# Altium PCB V2.1.2.PcbDoc
Units mm, origin at the board's own origin, x right, y up, seen from the top; angles counter-clockwise.
Board outline 50 x 50 mm, 2 copper layers (Top Layer, Bottom Layer), stack 1.57 mm thick; 57 components, 44 nets, 215 pads, 71 vias.
Unrouted connection lines stored in the file: 2.
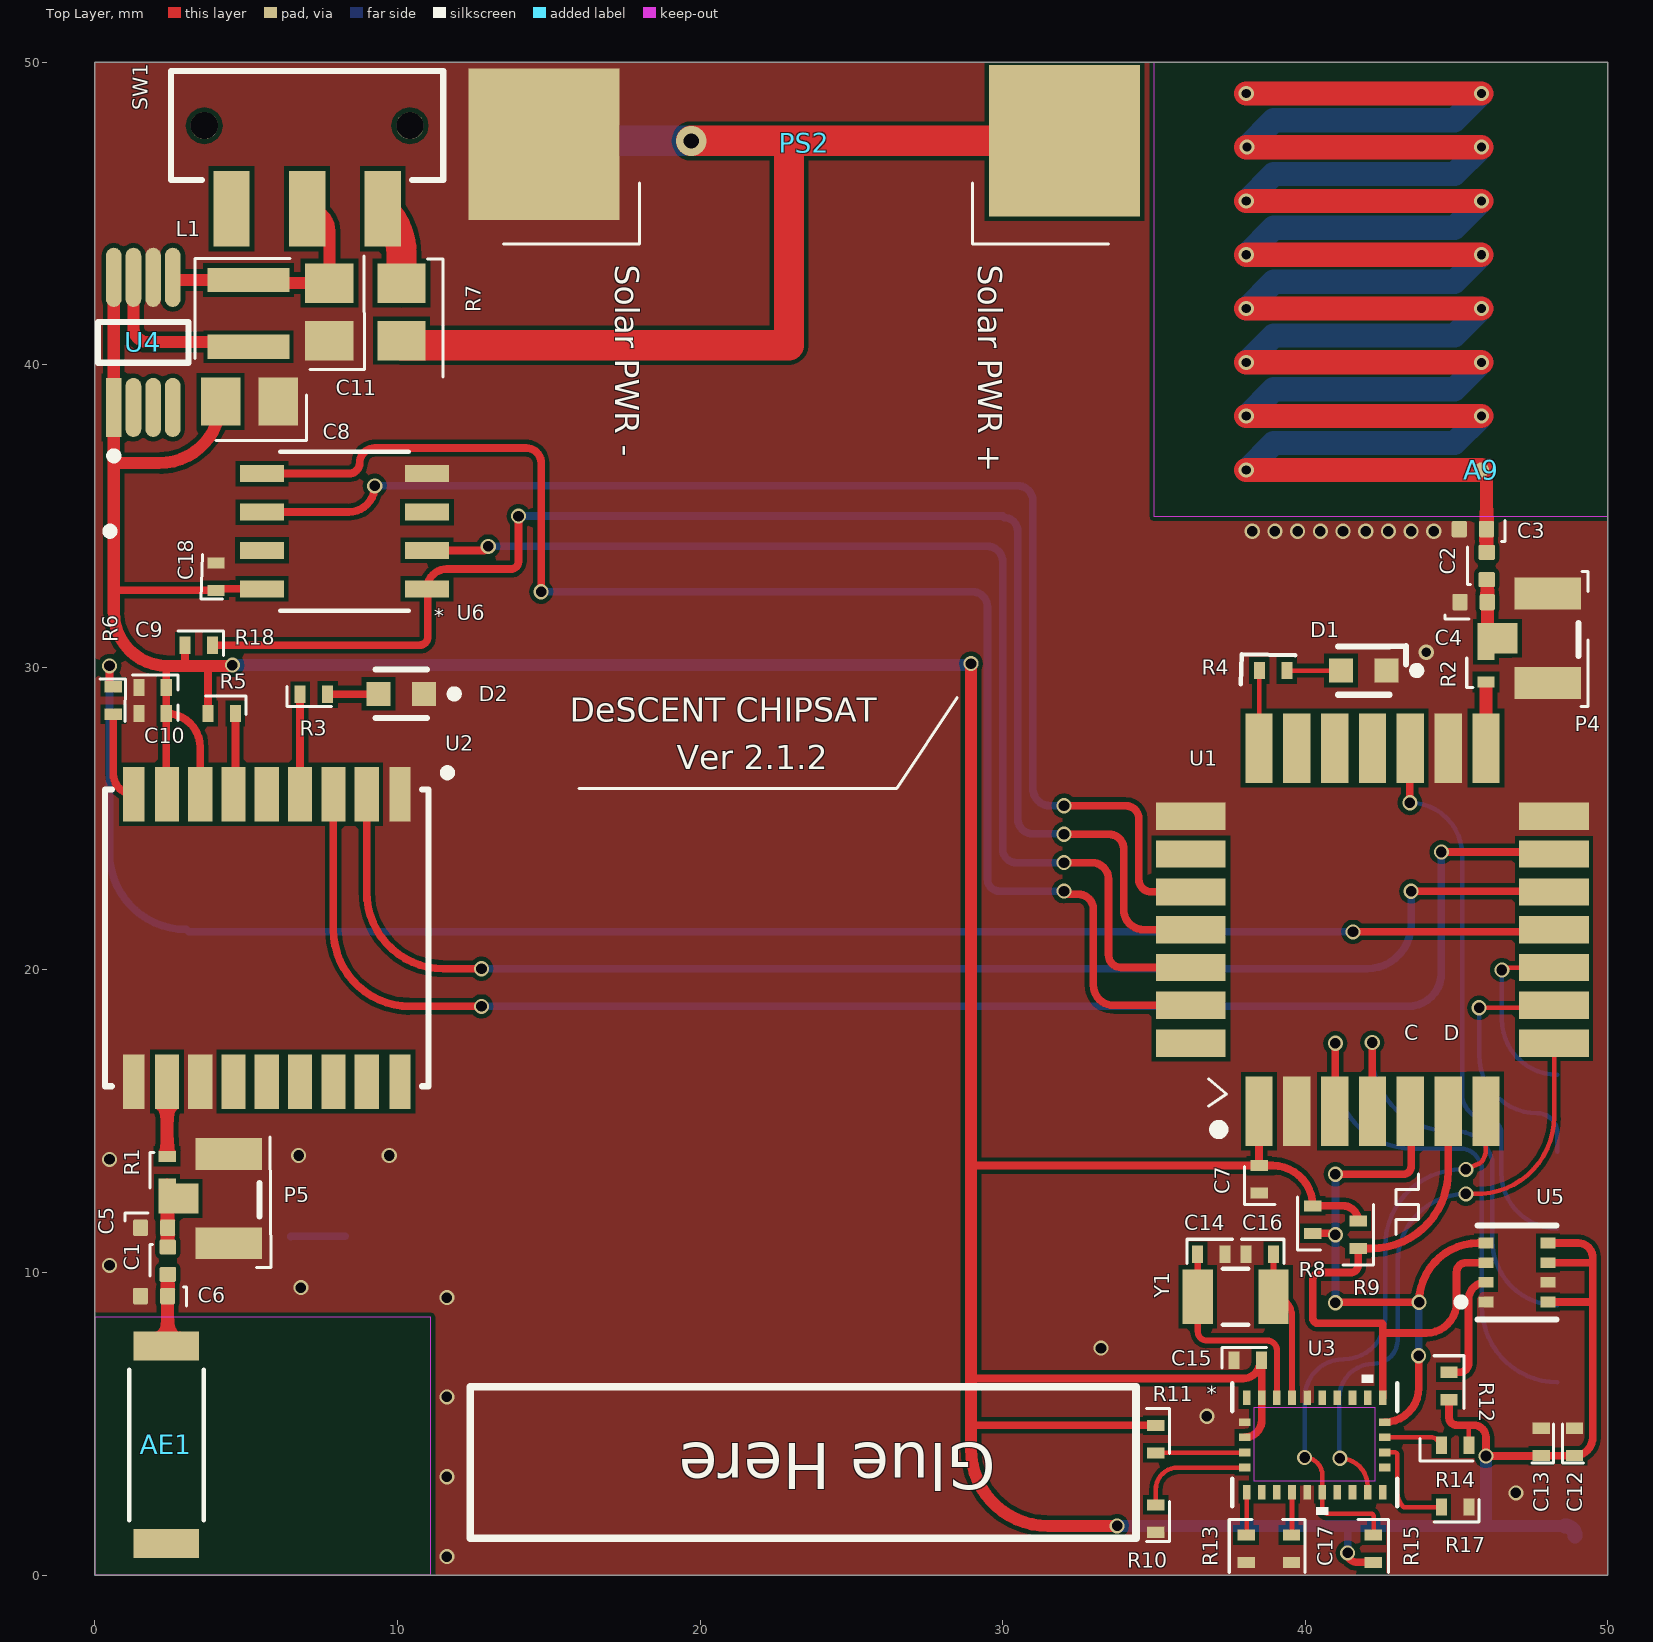
[diagram p0: Top Layer view]
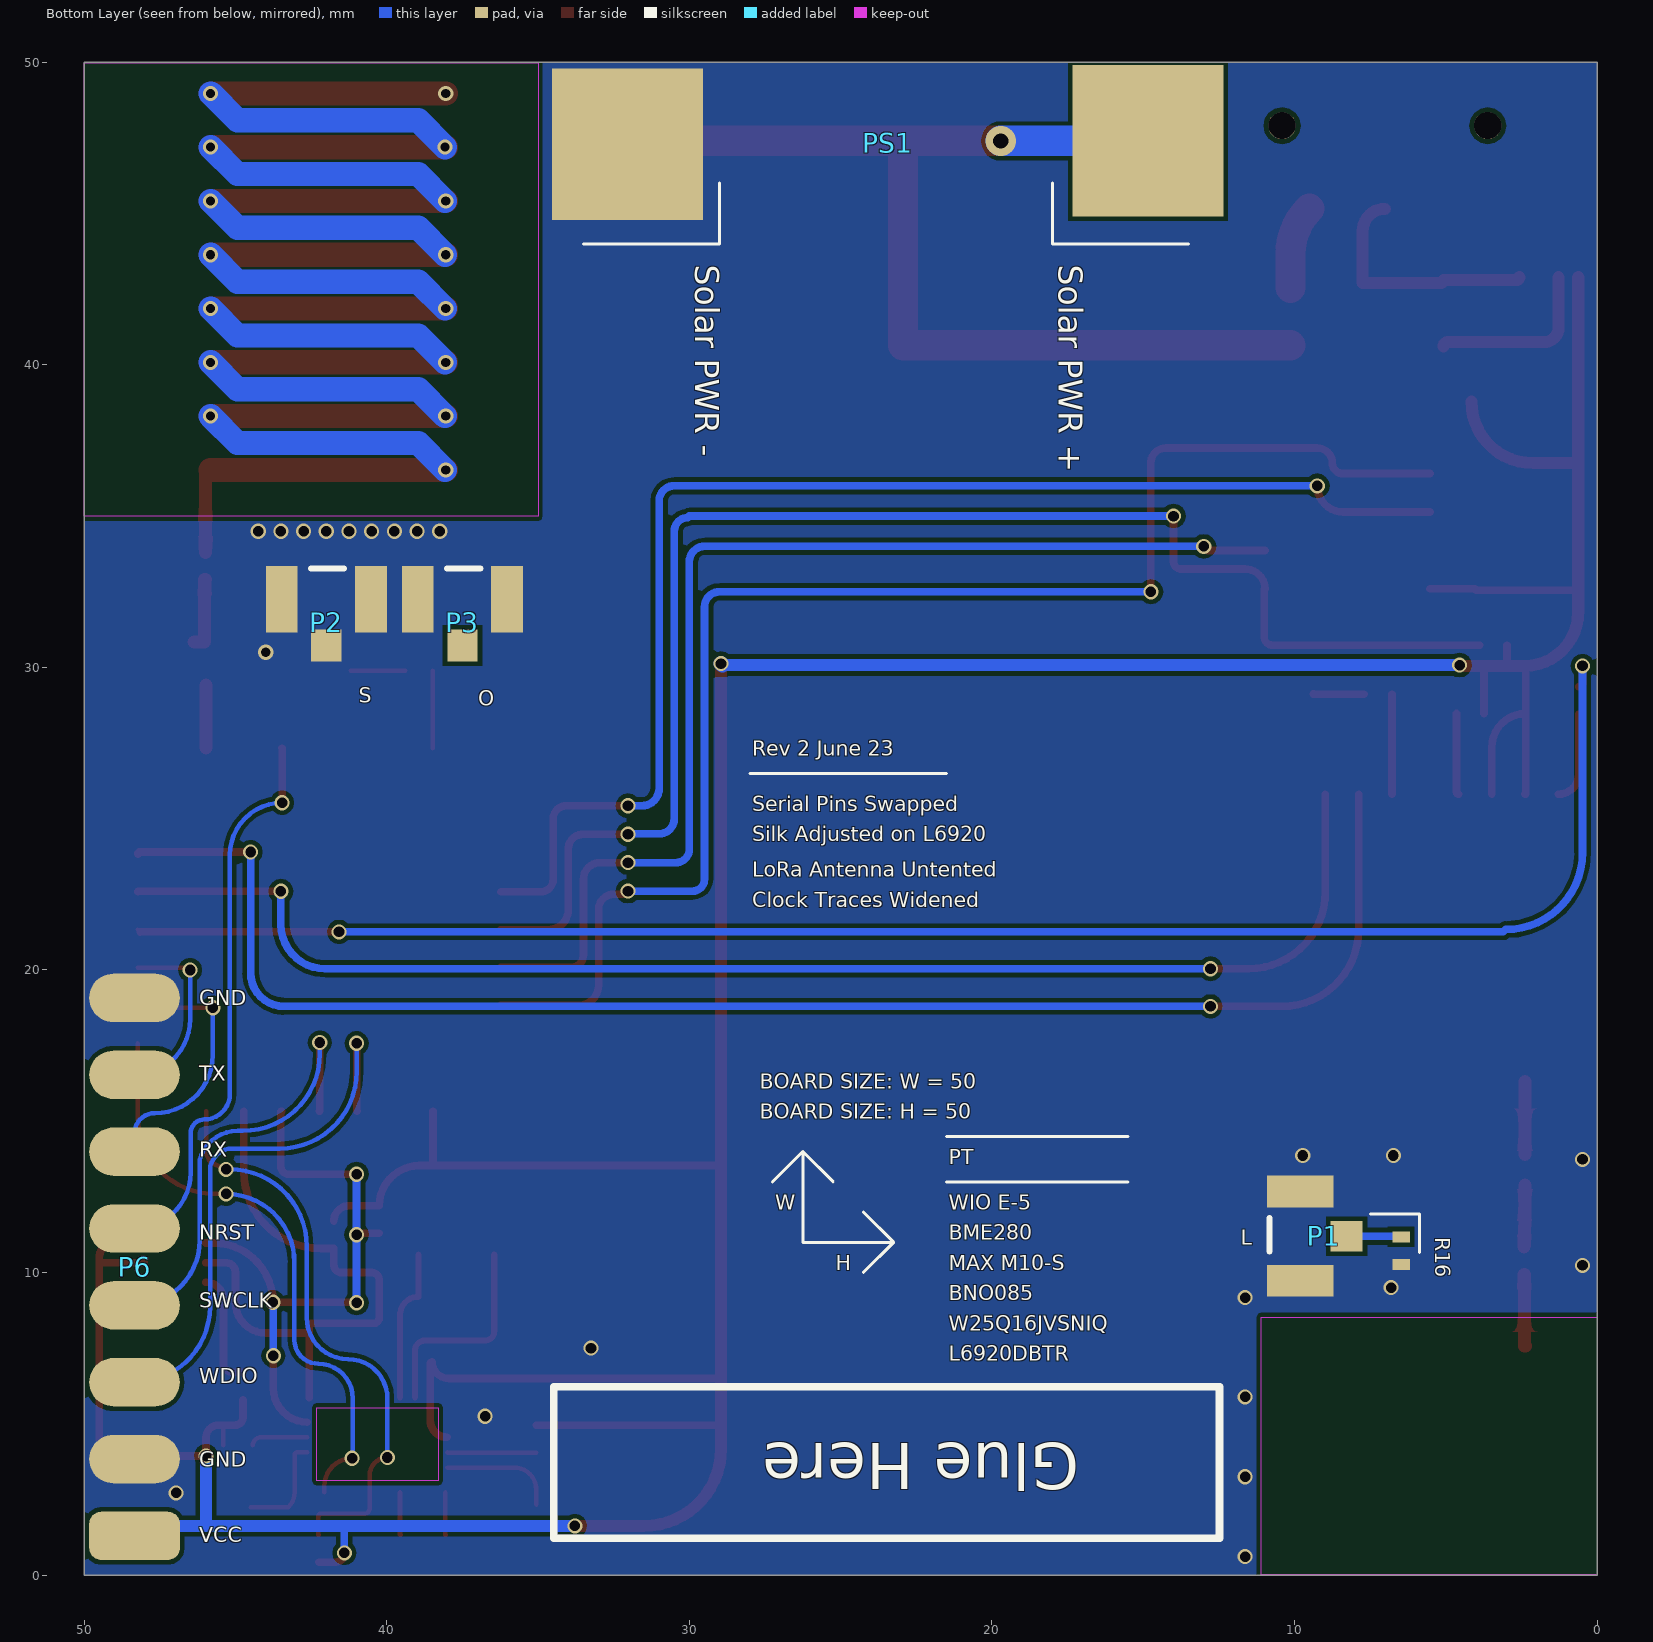
[diagram p1: Bottom Layer view, seen from below]

## Layer stack, top to bottom
Top Solder: solder mask 0.0254, SM-001, Dk 4
Top Layer: signal copper 0.035
Dielectric 1: dielectric 1.5, FR-4, Dk 4.8
Bottom Layer: signal copper 0.035
Bottom Solder: solder mask 0.0254, SM-001, Dk 4

## Board outline
0,0 50,0 50,50 0,50

## Design rules (kind name [scope] priority, off if disabled: settings)
Clearance [All] p1: gap=0.15 ignorepadtopadclearanceinfootprint=TRUE
ComponentClearance ComponentClearance_1 [InComponent('PS1')] p1: gap=0 collisioncheckmode=3 verticalgap=0 showdistances=FALSE
ComponentClearance [All] p2: gap=0 collisioncheckmode=3 verticalgap=0 showdistances=FALSE
MaxMinImpedance "Schematic Impedance Constraint_5" [InNet('LoRa_ANT_Tuning')] p1: minimum=49.00 maximum=51.00
MaxMinImpedance "Schematic Impedance Constraint_3" [InNet('GPS_ANT_Tuning')] p2: minimum=49.00 maximum=51.00
MaxMinImpedance "Schematic Impedance Constraint_2" [InNet('PI_NETWORK_LoRa')] p3: minimum=49.00 maximum=51.00
MaxMinImpedance "Schematic Impedance Constraint_1" [InNet('LoRa_ANT')] p4: minimum=49.00 maximum=51.00
MaxMinImpedance "Schematic Impedance Constraint" [InNet('PI_NETWORK_GPS')] p5: minimum=49.00 maximum=51.00
PlaneClearance [All] p1 off: clearance=0.508
PlaneConnect PlaneConnect_1 [InNet('VCC')] p1: planeconnectstyle=Direct reliefexpansion=0.508 reliefentries=4 reliefconductorwidth=0.254 reliefairgap=0.254
PlaneConnect [InNet('GND')] p2: planeconnectstyle=Direct reliefexpansion=0.508 reliefentries=4 reliefconductorwidth=0.254 reliefairgap=0.254
PolygonConnect [All] p1: connectstyle=Direct reliefconductorwidth=0.254 reliefentries=4 polygonreliefangle="90 Angle" airgapwidth=0.254
RoutingVias [All] p1: holewidth=0.711 width=1.27 viastyle="Through Hole" minholewidth=0.711 minwidth=1.27 maxholewidth=0.711 maxwidth=1.27
SolderMaskExpansion [All] p1: expansion=0.102 istentingtop=FALSE
SupplyNets "Schematic Supply Nets_1" [InNet('VCC')] p1: voltage=0.000
SupplyNets "Schematic Supply Nets" [InNet('GND')] p2: voltage=0.000
Width Width_1 [All] p1 off: maxlimit=0.254 minlimit=0.254 preferedwidth=0.254
Width [All] p2: maxlimit=1 minlimit=0.14 preferedwidth=0.254 minimp=50.000000 maximp=50.000000 favimp=50.000000 checkconnectedcopper=TRUE // min width
27 further rules are at their usual default settings.

## Classes and differential pairs
polygon class PolygonClass_1: GND_L01_P006

## Components (designator, comment, footprint, x,y, rotation, side; value= is the part's Value field where it differs from the comment)
A9 "helical_antenna_shorter_1_loop" LoRa_ANT_915_shorter_1_loop 50.902,35.128 r0 top
AE1 "1575AT43A0040E" ANT_1575AT_JOT-L 1.862,4.204 r90 top
C1 "C0402C223K8PACTU" PI_NET_CAPACITOR_0402 2.413,10.389 r270 top value="22,000 pF"
C2 "C0402C223K8PACTU" PI_NET_CAPACITOR_0402 45.999,33.35 r270 top value="22,000 pF"
C3 "C0402C223K8PACTU" PI_NET_CAPACITOR_0402 45.542,34.569 r0 top value="22,000 pF"
C4 "C0402C223K8PACTU" PI_NET_CAPACITOR_0402 45.568,32.156 r180 top value="22,000 pF"
C5 "C0402C223K8PACTU" PI_NET_CAPACITOR_0402 1.956,11.481 r180 top value="22,000 pF"
C6 "C0402C223K8PACTU" PI_NET_CAPACITOR_0402 1.956,9.22 r180 top value="22,000 pF"
C7 "4.7uF" 0402 38.481,13.081 r270 top
C8 "47uF" RCL_M0805 5.105,38.786 r0 top
C9 "0.1uF" 0402 1.905,29.337 r180 top
C10 "10uF" 0402 1.905,28.473 r180 top
C11 "47uF" RCL_M0805 7.75,41.75 r270 top
C12 "0.1uF" 0402 48.9,4.4 r90 top
C13 "10uF" 0402 47.8,4.4 r90 top
C14 "22pF" 0402 36.9,10.6 r0 top
C15 "0.1uF" 0402 38.1,7.1 r180 top
C16 "22pF" 0402 38.5,10.6 r180 top
C17 "0.1uF" 0402 39.548,0.873 r270 top
C18 "100nF" 0402 4,33 r90 top
D1 "LTST-C191TBKT" FP-LTST-C191TBKT-MFG 41.935,29.896 r180 top
D2 "LTST-C191TBKT" FP-LTST-C191TBKT-MFG 10.125,29.125 r180 top
L1 "10uH" "ASPI-0315FS_ASPI-0315FS - The_real_one" 5.08,41.699 r90 top
P1 "U.FL-R-SMT-1(01)" HRS-U.FL-R-SMT-3_V 9.804,11.201 r90 bottom
P2 "U.FL-R-SMT-1(01)" HRS-U.FL-R-SMT-3_V 42,32.25 r180 bottom
P3 "U.FL-R-SMT-1(01)" HRS-U.FL-R-SMT-3_V 37.5,32.25 r180 bottom
P4 "U.FL-R-SMT-1(01)" HRS-U.FL-R-SMT-3_V 48.016,30.963 r270 top
P5 "U.FL-R-SMT-1(01)" HRS-U.FL-R-SMT-3_V 4.42,12.446 r270 top
P6 "61300811121" 8pinhead_Long 48.336,10.185 r90 bottom
PS1 "ALTA_CELL" ALTA_CELL_SAME_SIZED_FEET 23.444,47.346 r90 bottom
PS2 "ALTA_CELL" ALTA_CELL_SAME_SIZED_FEET 23.444,47.346 r90 top
R1 "0k" 0402 2.388,13.386 r270 top
R2 "0k" 0402 45.974,29.972 r90 top
R3 "1k" 0402 7.239,29.108 r0 top
R4 "1k6" 0402 38.938,29.896 r180 top
R5 "0k" 0402 4.191,28.473 r0 top
R6 "0k" 0402 0.61,28.905 r270 top
R7 "0k" RCL_M0805 10.135,41.75 r90 top
R8 "2.2k" 0402 40.25,11.75 r90 top
R9 "2.2k" 0402 41.75,11.25 r90 top
R10 "10k" 0402 35.06,4.496 r90 top
R11 "10k" 0402 35.06,1.87 r270 top
R12 "4.7k" 0402 44.75,6.25 r270 top
R13 "10k" 0402 38.049,0.873 r270 top
R14 "10k" 0402 44.954,4.293 r180 top
R15 "10k" 0402 42.25,0.873 r270 top
R16 "50" 0402 6.475,10.725 r270 bottom
R17 "10k" 0402 44.954,2.25 r0 top
R18 "10k" 0402 3.433,30.734 r0 top
SW1 "JS102011SAQN" FP-JS102011SAQN-MFG 7.014,47.904 r180 top
U1 "MODULE_LORA_E5" MODULE28P-1-25-12X12X2-5MM 42.224,21.33 r90 top
U2 "MAX-M10S-00B" "FP-MAX-M10S-00B-MFG - duplicate" 5.682,21.057 r270 top
U3 "BNO085" QFN28_BNO086_CEV 40.314,4.305 r0 top
U4 "L6920DBTR" L6920DBTR 1.6,40.742 r90 top
U5 "d58e2f6669bc67e6a2bc6a28610ca79" FP-BME280-MFG 47,10 r180 top
U6 "W25Q16JVSNIQ" SOIC_150MIL_WIN 8.25,34.5 r180 top
Y1 "9HT10-32.768KBZF-T" XTAL_9HT10_TXC 37.7,9.2 r180 top

## Footprints (in the part's own frame and the unit in brackets; to place one, negate y for a bottom-side part, rotate by r counter-clockwise, add the part's x,y. Pads: shape width x height; smd on the part's side, far side on the other; paste and mask are expansions set on the pad)
8pinhead_Long [mm] "Pin Header, pitch 2.54 mm, THT, Vertical, single row, 8p"
  rrect50% 1.6x3 smd: 1(-8.89,0)
  oval 1.6x3 smd: 2(-6.35,0) 3(-3.81,0) 4(-1.27,0) 5(1.27,0) 6(3.81,0) 7(6.35,0) 8(8.89,0)
0402 [mm]
  rect 0.365x0.572 smd paste+0 mask+0: 1(-0.454,0) 2(0.454,0)
ALTA_CELL_SAME_SIZED_FEET [mm] "SAME SIZED FEET AND CORRECT POLARITY"
  rect 5x5 smd: +(0.056,-8.603) -(-0.055,8.603)
  silkscreen extent -46.12,-10.97 -41.12,11.03
ANT_1575AT_JOT-L [mm]
  rect 0.963x2.16 smd paste+0 mask+0: 1(3.363,-0.5) 2(-3.163,-0.5)
  Keep-Out Layer region: 4.318,-9.238 4.318,1.86 -4.2,1.86 -4.2,-9.238
  silkscreen extent -2.39,-1.73 2.59,0.73
"ASPI-0315FS_ASPI-0315FS - The_real_one" [mil]
  rect 31.5x106.3 smd: 1(-43.31,0) 2(43.31,0)
FP-BME280-MFG [mm]
  rect 0.5x0.35 smd paste+0 mask+0: 1(1.025,0.975) 2(1.025,0.325) 3(1.025,-0.325) 4(1.025,-0.975) 5(-1.025,-0.975) 6(-1.025,-0.325) 7(-1.025,0.325) 8(-1.025,0.975)
  silkscreen extent -1.3,-1.55 1.97,1.55
FP-JS102011SAQN-MFG [mm]
  rect 1.2x2.5 smd paste+0 mask+0: 1(-2.5,2.75) 2(0,2.75) 3(2.5,2.75)
  round 0.9 hole 0.9 unplated paste-2539.97 mask+0: ""(-3.4,0) ""(3.4,0)
  silkscreen extent -4.5,-1.8 4.5,1.8
FP-LTST-C191TBKT-MFG [mm]
  rect 0.8x0.8 smd paste+0 mask+0: 1(-0.75,0) 2(0.75,0)
  silkscreen extent -1.88,-0.8 0.85,0.8
"FP-MAX-M10S-00B-MFG - duplicate" [mm]
  rect 1.8x0.7 smd paste-1000 mask+0: 1(-4.75,4.4) 9(-4.75,-4.4) 10(4.75,-4.4) 18(4.75,4.4)
  rect 1.8x0.8 smd paste-1000 mask+0: 2(-4.75,3.3) 3(-4.75,2.2) 4(-4.75,1.1) 5(-4.75,0) 6(-4.75,-1.1) 7(-4.75,-2.2) 8(-4.75,-3.3) 11(4.75,-3.3) 12(4.75,-2.2) 13(4.75,-1.1) 14(4.75,0) 15(4.75,1.1) 16(4.75,2.2) 17(4.75,3.3)
  silkscreen extent -5.59,-5.35 4.9,6.09
HRS-U.FL-R-SMT-3_V [mm] "SMT, 3-Leads, Body 2.6x2.6mm"
  rect 1.05x2.2 smd: 1(-1.475,0) 2(1.475,0)
  rect 1x1.05 smd: 3(0,-1.525)
  silkscreen extent -0.51,1.02 0.59,1.02
L6920DBTR [mm]
  rect 1.954x0.516 smd paste+0 mask+0: 1(-2.15,0.975)
  rrect100% 1.954x0.516 smd paste+0 mask+0: 2(-2.15,0.325) 3(-2.15,-0.325) 4(-2.15,-0.975) 5(2.15,-0.975) 6(2.15,-0.325) 7(2.15,0.325) 8(2.15,0.975)
  silkscreen extent -3.87,-1.5 0.67,1.5
LoRa_ANT_915_shorter_1_loop [mil]
  round 20 smd paste-99999 mask+0: ANT(-200,55)
  Top Layer lines w31.5: -505.87,55 -200,55 ; -505.87,125 -200,125 ; -505.87,195 -200,195 ; -505.87,265 -200,265 ; -505.87,335 -200,335 ; -505.87,405 -200,405 ; -505.87,475 -200,475 ; -505.87,545 -200,545
  Bottom Layer lines w10: -505.43,55 -505,55 ; -505.43,125 -505,125 ; -505.43,195 -505,195 ; -505.43,265 -505,265 ; -505.43,335 -505,335 ; -505.43,405 -505,405 ; -505.43,475 -505,475 ; -505.43,545 -505,545
  Bottom Layer lines w31.5: -505,55 -470,90 -235,90 -200,125 ; -505,125 -470,160 -235,160 -200,195 ; -505,195 -470,230 -235,230 -200,265 ; -505,265 -470,300 -235,300 -200,335 ; -505,335 -470,370 -235,370 -200,405 ; -505,405 -470,440 -235,440 -200,475 ; -505,475 -470,510 -235,510 -200,545
  Keep-Out Layer region: -625.98,-5.55 -35.43,-5.55 -35.43,585 -625.98,585
MODULE28P-1-25-12X12X2-5MM [mm]
  rect 2.3x0.9 smd: 1(-6,3.75) 2(-6,2.5) 3(-6,1.25) 4(-6,0) 5(-6,-1.25) 6(-6,-2.5) 7(-6,-3.75) 15(6,-3.75) 16(6,-2.5) 17(6,-1.25) 18(6,0) 19(6,1.25) 20(6,2.5) 21(6,3.75)
  rect 0.9x2.3 smd: 8(-3.75,-6) 9(-2.5,-6) 10(-1.25,-6) 11(0,-6) 12(1.25,-6) 13(2.5,-6) 14(3.75,-6) 22(3.75,6) 23(2.5,6) 24(1.25,6) 25(0,6) 26(-1.25,6) 27(-2.5,6) 28(-3.75,6)
  silkscreen extent -6.73,4.95 -6.48,5.21
PI_NET_CAPACITOR_0402 [mm] "Chip Capacitor, Body 1.0x0.5mm, Height 0.6mm, NO SILK"
  rrect25% 0.5x0.55 smd: 1(-0.45,0) 2(0.45,0)
QFN28_BNO086_CEV [mil]
  rect 10x19 smd paste+0 mask+0: 1(-88.58,61.5) 6(-88.58,-61.5) 7(-68.9,-61.5) 8(-49.21,-61.5) 9(-29.53,-61.5) 10(-9.84,-61.5) 11(9.84,-61.5) 12(29.53,-61.5) 13(49.21,-61.5) 14(68.9,-61.5) 15(88.58,-61.5) 20(88.58,61.5) 21(68.9,61.5) 22(49.21,61.5) 23(29.53,61.5) 24(9.84,61.5) 25(-9.84,61.5) 26(-29.53,61.5) 27(-49.21,61.5) 28(-68.9,61.5)
  rect 15x10 smd paste+0 mask+0: 2(-91,29.53) 3(-91,9.84) 4(-91,-9.84) 5(-91,-29.53) 16(91,-29.53) 17(91,-9.84) 18(91,9.84) 19(91,29.53)
  silkscreen extent -108,-91 107,91
RCL_M0805 [mm]
  rect 1.3x1.6 smd: 1(-0.95,0) 2(0.95,0)
SOIC_150MIL_WIN [mil]
  rect 57.5x22 smd paste+0 mask+0: 1(-107.25,75) 2(-107.25,25) 3(-107.25,-25) 4(-107.25,-75) 5(107.25,-75) 6(107.25,-25) 7(107.25,25) 8(107.25,75)
  silkscreen extent -84,-104 83,104
XTAL_9HT10_TXC [mil]
  rect 39.5x71 smd paste+0 mask+0: 1(-49.25,0) 2(49.25,0)
  silkscreen extent -16,-36 16,36

## Part data
A9: "helical_antenna schematic for the DeSCENT v1 ChipSat"
AE1: "No Description Available", Mfr_Name="Johanson Technology", Digi-Key_Part_Number_1=712-1003-2-ND, Digi-Key_Part_Number_2=712-1003-1-ND, Digi-Key_Part_Number_3=712-1003-6-ND
C1 C2 C3 C4 C5 C6: library part 0402RFCapacitor_NO_SILK, "CAP CER 0.022UF 10V X5R 0402", Capacitance="22,000 pF", Manufacturer=Kemet, Package=C0402-BB, Temperature="-55°C to +125°C", Temperature Characteristic=X5R, Temperature Coefficient=15%, Temperature Range High=+125°C, Temperature Range Low=-55°C, Tolerance=0.1, Voltage Rating="10 V", Automotive=No, Category=Cap, ComponentLink2Description=Datasheet, ComponentLink2URL=https://content.kemet.com/datasheets/KEM_C1002_X7R_SMD.pdf, Device Class L1="Passive Components", Device Class L2=Capacitors, Device Class L3="Ceramic Capacitors", Digikey Description="CAP CER 0.022UF 10V X5R 0402", Height=0.55mm, Ipc Land Pattern Name=CAPC10050X50, Lead Free=Yes, Manufacturer Part Number=C0402C223K8PACTU, Material=Ceramic, Mouser Description="Multilayer Ceramic Capacitors MLCC - SMD/SMT 10volts 22000pF X5R 10%", Octopart=https://octopart.com/c0402c223k8pactu-kemet-140074, RoHS=TRUE
C7 C8 C9 C10 C11 C12 C13 C14 C15 C16 C17: library part C-EUC0805K, "CAPACITOR, European symbol", DeviceName=C0805K, DeviceSetName=C-EU, GateName_1=G$1, LibraryName=rcl, SymbolName_1=C-EU
C18: library part RCL_C-EUC0805, Package=RCL_C0805, DeviceName=C0805, DeviceSetName=RCL_C-EU, GateName_1=G$1, LibraryName=AmbaSat-1v1-01-NO-solar, SymbolName_1=RCL_C-EU
D1 D2: library part CMP-22017-000008-1, "LED BLUE CLEAR CHIP SMD", Case Code (Imperial)=0603, Case Code (Metric)=1608, Color=Blue, Forward Current=20mA, Forward Voltage=3.8V, Lens Color=Colorless, Max Operating Temperature=80°C, Max Power Dissipation=75mW, Min Operating Temperature=-20°C, Package Quantity=1, Power Dissipation=76mW, Reverse Voltage=5V, Case/Package=0603, Depth=1.6mm, Dominant Wavelength=475nm, Height=0.55mm, Illumination Color=Blue, Lead Free="Lead Free", Length=0.8mm, Lens Style=Diffused, Lens Transparency=Clear, Luminous Intensity=180mcd, Mount="Surface Mount", Number of Elements=1, Number of LEDs=1, Number of Pins=2, Packaging="Tape and Reel", Radiation Hardening=No, Test Current=20mA, Viewing Angle=130°, Wavelength=468nm, Width=0.8mm
L1: library part ASPI-0315FS, DeviceSetName=ASPI-0315FS, GateName_1=G$1, LibraryName=ASPI-0315FS, SymbolName_1=ASPI-0315FS
P1 P2 P3 P4 P5: library part CN-1P-M-R3, "Ultra Small Coaxial Connector, 6 GHz, -40 to 90 degC, 3-Pin SMD, RoHS, Bulk", Dielectric Material=LiquidCrystalPolymer(LCP), Frequency - Max=6GHz, Housing Color=Silver, Manufacturer="Hirose Electric", Operating Temperature=-40degC~90degC, Package Description="3-Pin Surface Mount Device, Body 2.6 x 2.6 mm", Package Reference=U.FL-R-SMT, Standard Package=100, Body Finish=Silver, Body Material=PhosphorBronze, Category=Connectors,Interconnects, Center Contact Material=PhosphorBronze, Center Contact Plating=Gold, Connector Style=U.FL, Connector Type=Jack,MalePin, Contact Termination=Solder, Datasheet URL=https://datasheet.ciiva.com/26945/getdatasheetpartid-475239-26945414.pdf, Datasheet Version=Feb-09, Dynamic Catalog=U.FLSeries, Family=CoaxialConnectors(RF), Fastening Type=Snap-On, Featured Product=HiroseU.FLSeries, Impedance=50Ohm, Manufacturer URL=https://www.hirose.com, Minimum Quantity=UltraMiniatureCoaxial, Mounting Type=SurfaceMount, Online Catalog=U.FLSeries, Other Names="H122041 / U.FL-R-SMT-1(01)-ND", Packaging=Bulk, Quantity Available=Bulk, Series=U.FL, Shield Termination=Solder, Unit PriceUSD=U.FL
P6: library part 8pinhead, Color=Black, Contact Resistance=20mΩ, Current Rating=3A, Max Operating Temperature=105°C, Min Operating Temperature=-40°C, Operating Supply Voltage=250V, Connector Type="Male Pin", Contact Material=Copper, Contact Mating Length=5.9944mm, Contact Plating=Gold, Gender=Male, Height=8.54mm, Lead Pitch=2.54mm, Mount="Through Hole", NexarPartId=32855533, Number of Contacts=8, Number of Pins=8, Number of Positions=8, Number of Rows=1, Orientation=Vertical, Packaging=Bulk, Pitch=2.54mm, REACH SVHC=Unknown, RoHS=Compliant, Termination=Solder, Voltage Rating=250V
PS1 PS2: library part ALTA_CELL_RESIZED, DeviceSetName=ALTA_CELL, GateName_1=G$1, LibraryName=ALTA_CELL, SymbolName_1=ALTA_CELL
R1 R2: library part R-EU_M0805, DeviceName=M0805, DeviceSetName=R-EU_, GateName_1=G$1, LibraryName=rcl, SymbolName_1=R-EU
R3 R4 R5 R6 R8 R9 R10 R11 R12 R13 R14 R15 R16 R17 R18: library part R-EU_M0805, "RESISTOR, European symbol", DeviceName=M0805, DeviceSetName=R-EU_, GateName_1=G$1, LibraryName=rcl, SymbolName_1=R-EU
R7: library part R-EU_M0805, "Larger Resistor for Solar", DeviceName=M0805, DeviceSetName=R-EU_, GateName_1=G$1, LibraryName=rcl, SymbolName_1=R-EU
SW1: library part CMP-2000-06501-2, "SWITCH SLIDE SPDT 300MA 6V", Case/Package=100, Contact Current Rating=300mA, Contact Resistance=70mR, Max Operating Temperature=85°C, Max Voltage Rating (DC)=6V, Min Operating Temperature=-40°C, Package Quantity=1, Actuator Length=2mm, Actuator Material=Nylon, Actuator Type=Standard, Contact Material="Copper Alloy", Contact Plating=Silver, Current Rating=300mA, Electrical Life=5000Cycles, Housing Material=Nylon, Illumination Type=Non-Illuminated, Lead Free="Lead Free", Length=9mm, Max Current Rating=300mA, Mount="Surface Mount", Orientation="Right Angle", Packaging="Tape and Reel", Radiation Hardening=No, REACH SVHC="No SVHC", Switch Function=On-On, Switch Travel=2mm, Termination="Gull Wing", Throw Configuration=SPDT, Voltage Rating (DC)=6V
U1: Package=MODULE28P-1.25-12X12X2.5MM, DeviceSetName=MODULE_LORA_E5, GateName_1=G$1, LibraryName=LORA-E5_Eagle_Library, SymbolName_1=MOUDLE_LORA_E5
U2: library part CMP-207130-000026-1, "GNSS LCC RX, ROM, TCXO, LNA, SAW"
U3: library part BNO086, "No Description Available", Mfr_Name=CEVA, RefDes=RefDes, Type="Motion Sensors"
U4: "IC REG BOOST ADJ/FIX 800MA 8MSOP / NON-OBS", Manufacturer=STMicroelectronics, Max Junction Temp=+150°C, Max Supply Voltage=5.5V, Min Supply Voltage=0.8V, Nominal Supply Current=9-11uA, Output Current=800mA, Output Voltage=1.8-5.2V, Package=MSOP8, Switching Frequency=1MHz, Temperature="to +150°C", Automotive=No, Category=IC, Ciiva Ids=1483122, ComponentLink2Description=Datasheet, ComponentLink2URL=https://www.st.com/content/ccc/resource/technical/document/datasheet/38/68/3c/50/c4/07/4b/83/CD00055960.pdf/files/CD00055960.pdf/jcr:content/translations/en.CD00055960.pdf, Device Class L1="Integrated Circuits (ICs)", Device Class L2="Power Management ICs", Device Class L3="Voltage Regulators - Switching", Digikey Description="IC REG BOOST ADJ/FIX 800MA 8MSOP", Height=1.1mm, Import Ts=1521869038, Ipc Land Pattern Name=SOIC65P490X130-8, Lead Free=Yes, Manufacturer Part Number=L6920DBTR, Mouser Description="Switching Voltage Regulators SYNCRONOUS RECT. STEP UP CONVERTER", Number Of Outputs=1, Octopart=https://octopart.com/l6920dbtr-stmicroelectronics-440113, Output Type=AdjustableProgrammable, Release Date=1327448952, RoHS=TRUE, Standoff Height=0.05mm, Switching Topology=Boost, Temperature Range High=+150°C
U5: "Temp and huminity sensor"
U6: "No Description Available", Mfr_Name=Winbond, RefDes=RefDes, Type=Type
Y1: "Crystal, 32.768khz, 12.5pf, 3.2 x 1.5mm", Package=None, Availability=Unavailable, MP=9HT10-32.768KBZF-T, Price=None

## Free pads (board coordinates)
  rect 1x1 smd: 1(46.188,30.96)
  rect 0.5x1 smd: 2(2.35,12.45)

## Via types
v1: diameter 0.5, hole 0.35, Top Layer to Bottom Layer, tented both sides, 36 vias
v2: diameter 0.5, hole 0.35, Top Layer to Bottom Layer, 18 vias
v3: diameter 0.5, hole 0.3, Top Layer to Bottom Layer, 15 vias
v4: diameter 1, hole 0.5, Top Layer to Bottom Layer, tented both sides, 1 vias
v5: diameter 0.5, hole 0.3, Top Layer to Bottom Layer, tented both sides, 1 vias

## Nets (pads, with @x,y where several pads share a name; then routed paths per layer and width w, separated by ;. In a path a pad name is that pad's centre, name@x,y a point inside that pad or via, vN(x,y) a via of type N, cw(c..) or ccw(c..) an arc to the next point about the centre after c; other vN are vias at no path point)
CS: R18.2 U1.25 U6.1 | length 48.9
  Top Layer w0.254: R18.2 10.734,30.734 ccw(c10.734,31) 11,31 11,32.569 ccw(c10.974,32.569) U6.1 cw(c11.629,32.595) 11.629,33.25 13.75,33.25 ccw(c13.75,33.5) 14,33.5 v1(14,35) ; v1(32.029,24.486) 33.514,24.486 cw(c33.514,24) 34,24 34,22 ccw(c34.67,22) 34.67,21.33 U1.25
  Bottom Layer w0.254: v1(14,35) 30,35 30.05,34.95 cw(c30.05,34.5) 30.5,34.5 30.5,25 ccw(c31,25) 31,24.5 32.029,24.5 v1(32.029,24.486)
GND: C3.1 C4.2 C5.2 C6.2 C7.2 C8.2 C9.2 C10.2 C11.2 C12.2 C13.2 C14.2 C15.2 C16.2 C17.2 C18.2 D1.1 D2.1 P1.1 P1.2 P2.1 P2.2 P2.3 P3.1 P3.2 P4.1 P4.2 P5.1 P5.2 P6.2 P6.8 PS1.- PS2.- R11.2 R13.2 R16.2 R17.2 U1.2 U1.14 U1.16 U1.22 U2.1 U2.10 U2.12 U3.2 U3.10 U3.25 U4.6 U5.1 U5.7 U6.4
  other v1: 46.965,2.718 36.75,5.25 33.25,7.5
  other v2: 11.633,0.61 11.633,3.251 11.633,5.893 11.633,9.169 6.807,9.5 0.483,10.236 0.483,13.741 6.731,13.868 9.728,13.868 38.25,34.5 39,34.5 39.75,34.5 40.5,34.5 41.25,34.5 42,34.5 42.75,34.5 43.5,34.5 44.25,34.5
  other v5: 44,30.5
GPS_ANT: AE1.1 C1.2 C6.1 | length 2.4
  Top Layer w0.43: AE1.1 2.406,7.567 C6.1 2.406,9.939 C1.2
GPS_ANT_Tuning: C1.1 C5.1 P5.3 pad.2 R1.2 | length 2.1
  Top Layer w0.43: pad.2@2.388,12.9 2.388,11.541 C5.1 C1.1
GPS_RESET: R6.1 U1.11 | length 56.2
  Top Layer w0.15: U1.11@48.144,21.25 U1.11
  Top Layer w0.254: v1(0.483,30.048) 0.483,29.486 ccw(c0.61,29.486) R6.1 ; v1(41.58,21.26) 48.134,21.26 U1.11@48.144,21.25
  Bottom Layer w0.254: v1(0.483,30.048) 0.483,23.876 ccw(c3.023,23.876) 3.023,21.336 3.099,21.26 v1(41.58,21.26)
GPS_RX: U1.12 U2.2 | length 45.9
  Top Layer w0.254: U2.2 8.982,22.581 ccw(c11.522,22.581) 11.522,20.041 v1(12.776,20.041) ; v1(43.5,22.6) 48.204,22.6 cw(c48.204,22.58) U1.12
  Bottom Layer w0.254: v1(12.776,20.041) 42.041,20.041 ccw(c42.041,21.5) 43.5,21.5 v1(43.5,22.6)
GPS_TX: U1.13 U2.3 | length 50.9
  Top Layer w0.254: U2.3 7.882,21.336 ccw(c10.422,21.336) 10.422,18.796 v1(12.776,18.796) ; v1(44.5,23.9) 48.154,23.9 cw(c48.154,23.831) U1.13
  Bottom Layer w0.254: v1(12.776,18.796) 43.396,18.796 ccw(c43.396,19.9) 44.5,19.9 v1(44.5,23.9)
IMU_INTN: U1.8 U3.14 | length 19.6
  Top Layer w0.15: v1(41.148,3.861) cw(c41.148,2.945) 42.064,2.945 U3.14 ; v1(45.313,12.598) 45.854,12.604 ccw(c45.852,12.754) 45.862,12.605 ccw(c45.684,15.138) 45.864,12.605 ccw(c45.684,15.138) 48.224,15.138 U1.8
  Bottom Layer w0.15: v1(41.148,3.861) cw(c41.148,3.886) 41.123,3.886 41.123,5.842 cw(c42.266,5.842) 42.266,6.985 ccw(c42.266,7.772) 43.053,7.772 43.053,10.338 cw(c45.314,10.338) v1(45.313,12.598)
IMU_RESET: R15.1 U1.7 U3.11 | length 19.4
  Top Layer w0.15: v1(39.98,3.886) cw(c39.98,3.302) 40.564,3.302 U3.11 40.564,2.21 ccw(c40.742,2.21) 40.742,2.032 42.164,2.032 cw(c42.164,1.93) 42.266,1.93 42.266,1.327 R15.1 ; v1(45.313,13.411) 45.771,13.613 ccw(c45.71,13.75) 45.826,13.655 ccw(c45.314,14.072) 45.828,13.657 ccw(c45.314,14.072) 45.974,14.072 U1.7
  Bottom Layer w0.15: v1(39.98,3.886) 39.98,5.842 cw(c41.275,5.842) 41.275,7.137 ccw(c41.275,8.509) 42.647,8.509 42.647,10.871 cw(c45.187,10.871) 45.187,13.411 v1(45.313,13.411)
LoRa_ANT: A9.ANT C2.1 C3.2 | length 2.7
  Top Layer w0.43: A9.ANT@45.992,36.5 C3.2 45.992,33.8 C2.1
  other v3: 38.053,36.525 38.053,38.303 45.822,38.303 38.053,40.081 45.822,40.081 38.053,41.859 45.822,41.859 38.053,43.637 45.822,43.637 38.053,45.415 45.822,45.415 38.075,47.193 45.822,47.193 38.053,48.971 45.822,48.971
LoRa_ANT_Tuning: C2.2 C4.1 P4.3 pad.1 R2.2 | length 2.4
  Top Layer w0.43: C2.2 46.018,32.9 C4.1 46.018,30.836 pad.1@46.364,30.836
MISO: U1.26 U6.2 | length 38.4
  Top Layer w0.254: U6.2 12.865,33.865 ccw(c12.865,34) v1(13,34) ; v1(32.029,23.546) 32.954,23.546 cw(c32.954,23) 33.5,23 33.5,20.5 ccw(c33.92,20.5) 33.92,20.08 U1.26
  Bottom Layer w0.254: v1(13,34) 29.5,34 cw(c29.5,33.5) 30,33.5 30,24 ccw(c30.454,24) 30.454,23.546 v1(32.029,23.546)
MOSI: U1.27 U6.5 | length 48.5
  Top Layer w0.254: U6.5 8.405,36.405 ccw(c8.405,36.75) 8.75,36.75 cw(c9.25,36.75) 9.25,37.25 14.25,37.25 cw(c14.25,36.75) 14.75,36.75 v1(14.75,32.5) ; v1(32.029,22.606) ccw(c32.135,22.606) 32.135,22.5 32.5,22.5 cw(c32.5,22) 33,22 33,19.5 ccw(c33.67,19.5) 33.67,18.83 U1.27
  Bottom Layer w0.254: v1(14.75,32.5) 29,32.5 cw(c29,32) 29.5,32 29.5,23 ccw(c29.894,23) 29.894,22.606 v1(32.029,22.606)
NetC14_1: C14.1 U3.27 Y1.2 | length 7.1
  Top Layer w0.2: C14.1 36.449,10.6 Y1.2 36.449,8.051 ccw(c36.75,8.051) 36.75,7.75 38.75,7.75 cw(c38.75,7.436) 39.064,7.436 U3.27
NetC16_1: C16.1 U3.26 Y1.1 | length 5.1
  Top Layer w0.2: C16.1 38.954,9.2 Y1.1 cw(c38.951,8.587) 39.564,8.587 U3.26
NetC17_1: C17.1 U3.9 | length 1.4
  Top Layer w0.15: C17.1 39.564,1.327 U3.9
NetD1_2: D1.2 R4.1 | length 1.8
  Top Layer w0.15: R4.1 D1.2
NetD2_2: D2.2 R3.2 | length 1.7
  Top Layer w0.254: R3.2 9.375,29.108 D2.2
NetL1_1: L1.1 U4.7 | length 5.8
  Top Layer w0.4: U4.7 1.275,41.225 ccw(c1.75,41.225) 1.75,40.75 4.929,40.75 cw(c4.929,40.599) L1.1
NetP1_3: P1.3 R16.1 | length 1.8
  Bottom Layer w0.254: R16.1 6.475,11.201 P1.3
NetPS1_+: PS1.+ PS2.+ R7.1 | length 36.8
  Top Layer w1: R7.1@10.135,40.645 22.936,40.645 22.936,47.402 ; v4(19.71,47.396) 19.71,47.402 22.936,47.402 ; PS2.+ 22.936,47.402
  Bottom Layer w1: PS1.+ 19.71,47.402 v4(19.71,47.396)
NetR3_1: R3.1 U2.4 | length 3.3
  Top Layer w0.254: U2.4 6.782,29.108 R3.1
NetR4_2: R4.2 U1.21 | length 2.6
  Top Layer w0.15: U1.21 38.484,27.33 R4.2
NetR5_2: R5.2 U2.6 | length 2.7
  Top Layer w0.254: U2.6 ccw(c4.582,25.87) 4.645,25.87 R5.2
NetR6_2: R6.2 U2.9 | length 3
  Top Layer w0.254: R6.2 0.61,26.479 ccw(c1.282,26.479) U2.9
NetR7_2: R7.2 SW1.1 | length 2.8
  Top Layer w1: SW1.1 cw(c8.016,43.656) 10.135,43.656 R7.2@10.135,42.545
NetR10_1: R10.1 U3.4 | length 3
  Top Layer w0.15: R10.1 38.002,4.042 U3.4
NetR11_1: R11.1 U3.5 | length 3.9
  Top Layer w0.15: R11.1 35.06,2.824 cw(c35.791,2.824) 35.791,3.555 U3.5
NetR12_1: R12.1 U5.2 | length 3.8
  Top Layer w0.254: R12.1 45.104,6.704 ccw(c45.104,7) 45.4,7 45.4,8.886 cw(c45.654,8.885) 45.401,8.902 ccw(c44,9) 45.404,9 45.404,9.152 cw(c45.658,9.151) 45.407,9.189 cw(c45.975,9.1) 45.852,9.662 U5.2
NetR13_1: R13.1 U3.6 | length 1.4
  Top Layer w0.15: R13.1 38.064,1.327 U3.6
NetR14_2: R14.2 U3.18 | length 2
  Top Layer w0.15: U3.18 44.165,4.555 cw(c44.165,4.293) R14.2@44.428,4.293
NetR17_1: R17.1 U3.17 | length 3.5
  Top Layer w0.15: U3.17 42.946,4.055 cw(c42.946,3.912) 43.048,4.013 43.048,2.739 ccw(c43.739,2.739) 43.25,2.25 R17.1
NRST: P6.5 U1.17 | length 18.7
  Top Layer w0.254: v1(43.459,25.527) 43.459,27.33 U1.17
  Bottom Layer w0.15: v1(43.459,25.527) cw(c43.459,23.8) 45.187,23.8 45.187,15.9 ccw(c46.025,15.9) 46.025,15.062 cw(c46.025,14.605) 46.482,14.605 46.482,13.31 ccw(c48.336,13.31) P6.5
PI_NETWORK_GPS: R1.1 U2.11 | length 2.4
  Top Layer w0.43: U2.11 2.388,15.622 R1.1@2.388,13.9
PI_NETWORK_LoRa: R2.1 U1.15 | length 2.1
  Top Layer w0.43: U1.15 R2.1@45.974,29.412
RX: P6.6 U1.9 | length 8.8
  Top Layer w0.15: v1(45.75,18.75) 48.144,18.75 ccw(c48.144,18.83) U1.9
  Bottom Layer w0.15: v1(45.75,18.75) 45.75,17.191 ccw(c47.676,17.191) 47.676,15.265 cw(c47.676,14.605) 48.336,14.605 P6.6
SCK: U1.24 U6.6 | length 43.8
  Top Layer w0.254: U6.6 8.385,35.135 ccw(c8.385,36) v1(9.25,36) ; v1(32.029,25.425) 34.075,25.425 cw(c34.075,25) 34.5,25 34.5,23 ccw(c34.92,23) 34.92,22.58 U1.24
  Bottom Layer w0.254: v1(9.25,36) 30.5,36 cw(c30.5,35.5) 31,35.5 31,26 ccw(c31.575,26) 31.575,25.425 v1(32.029,25.425)
SCL: R8.1 U1.5 U3.19 U5.4 | length 20.2
  Top Layer w0.254: R8.1 40.954,11.296 cw(c40.954,11.25) v1(41,11.25) ; v1(41,9) 41,9.017 v1(43.764,9.017) cw(c45.722,9.017) 45.722,10.975 U5.4 ; v1(41,13.25) 43.25,13.25 ccw(c43.25,13.5) 43.5,13.5 43.5,15.304 ccw(c43.474,15.304) U1.5 ; U3.19 ccw(c42.625,6.18) 43.75,6.18 v1(43.75,7.25)
  Bottom Layer w0.254: v1(41,9) v1(41,11.25) v1(41,13.25) ; v1(43.75,7.25) 43.757,7.257 43.757,9.01 v1(43.764,9.017)
SDA: R9.1 U1.6 U3.20 U5.3 | length 20
  Top Layer w0.254: U3.20 42.564,8.001 42.564,8.262 ccw(c42.5,8.262) 42.5,8.326 40.424,8.326 cw(c40.424,8.5) 40.25,8.5 40.25,9.75 cw(c40.5,9.75) 40.5,10 41.5,10 ccw(c41.5,10.25) 41.75,10.25 R9.1 42.184,10.796 ccw(c42.184,13.336) 44.724,13.336 U1.6 ; 42.564,8 44,8 ccw(c44,9) 45,9 45,10 cw(c45.325,10) 45.325,10.325 U5.3
SWCLK: P6.4 U1.4 | length 14.6
  Top Layer w0.254: v1(42.215,17.602) 42.215,15.33 U1.4
  Bottom Layer w0.15: v1(42.215,17.602) 42.215,17.221 ccw(c44.755,17.221) 44.755,14.681 44.933,14.681 cw(c44.933,13.386) 46.176,13.748 cw(c46.032,13.707) 46.182,13.708 46.182,11.07 ccw(c48.336,11.07) P6.4
SWDIO: P6.3 U1.3 | length 18.3
  Top Layer w0.254: U1.3 ccw(c40.974,15.352) 40.996,15.352 v1(40.996,17.577)
  Bottom Layer w0.15: v1(40.996,17.577) 40.996,16.637 ccw(c43.536,16.637) 43.536,14.097 45.136,14.097 cw(c45.136,13.437) 45.684,13.805 45.751,13.705 cw(c45.314,13.411) 45.84,13.439 45.84,8.872 ccw(c48.336,8.872) P6.3
TX: P6.7 U1.10 | length 6.3
  Top Layer w0.15: v1(46.5,20) cw(c46.58,20) 46.58,20.08 U1.10
  Bottom Layer w0.15: v1(46.5,20) 46.5,18.372 ccw(c48.336,18.372) P6.7
VCC: C7.1 C8.1 C9.1 C10.1 C12.1 C13.1 C15.1 C18.1 P6.1 R5.1 R8.2 R9.2 R10.2 R12.2 R14.1 R15.2 R18.1 U1.1 U2.7 U2.8 U3.3 U3.28 U4.1 U4.8 U5.5 U5.6 U5.8 U6.8 | length 164.5
  Top Layer w0.15: 45.287,4.956 cw(c45.287,4.835) 45.408,4.835 R14.1
  Top Layer w0.25: v1(41.402,0.737) ccw(c41.719,0.737) 41.719,0.419 R15.2
  Top Layer w0.254: 0.625,32.5 cw(c0.671,32.5) 0.671,32.546 C18.1 cw(c4.049,32.546) 4.049,32.595 U6.8 ; U2.8 cw(c2.382,25.83) 2.359,25.83 C10.1 ; 2.4,30.048 ccw(c2.4,30.007) 2.359,30.007 C9.1 C10.1 ; 2.848,30.048 ccw(c2.848,30.18) 2.979,30.18 R18.1 ; U2.7 3.482,27.351 ccw(c2.359,27.351) C10.1 ; R5.1 3.737,30.013 cw(c3.772,30.013) 3.772,30.048 ; 28.956,4.978 ccw(c28.985,4.978) 28.985,4.95 R10.2 ; 28.956,6.5 37.954,6.5 ccw(c37.954,7.046) 38.5,7.046 cw(c38.5,6.982) 38.564,6.982 U3.28 38.564,5.117 cw(c38.002,5.117) U3.3 ; 28.956,7 cw(c29.002,7) 29.002,7.046 ; 28.956,7.696 ccw(c28.981,7.696) 28.981,7.671 ; 28.956,13.513 cw(c28.978,13.513) 28.978,13.535 38.474,13.535 U1.1 ; C7.1 38.919,13.535 cw(c38.919,12.204) R8.2 41.25,12.204 cw(c41.25,11.704) R9.2 ; R12.2 44.755,5.796 44.755,5.207 ccw(c45.006,5.207) 45.006,4.956 45.287,4.956 45.568,4.956 cw(c45.568,4.55) 45.974,4.55 v1(45.974,3.937) 47.791,3.937 C13.1 C12.1 ccw(c48.9,4.546) 49.5,4.546 49.5,9 ; U5.8 49.475,9.025 cw(c49.475,9) 49.5,9 ; U5.6 49.425,10.325 cw(c49.425,10.25) 49.5,10.25 ; U5.5 49.025,10.975 cw(c49.025,10.5) 49.5,10.5 49.5,10.25 ; 49.5,9 49.5,10.25
  Top Layer w0.4: U4.8 U4.1 0.625,36.75 ; C8.1 cw(c2.12,38.786) 2.12,36.75 0.625,36.75 ; v1@4.521,30.048 3.772,30.048 2.848,30.048 2.4,30.048 cw(c2.4,31.823) 0.625,31.823 0.625,32.5 0.625,36.75 ; v1(28.956,30.124) 28.956,13.513 28.956,7.696 28.956,7 28.956,6.5 28.956,4.978 28.956,4.166 ccw(c31.496,4.166) 31.496,1.626 v1(33.782,1.626)
  Bottom Layer w0.25: v1(41.402,0.737) 41.402,1.626
  Bottom Layer w0.4: v1(4.547,30.074) v1@28.905,30.074 ; v1(33.782,1.626) 41.402,1.626 45.999,1.626 P6.1@48.59,1.626 ; 45.974,1.651 v1(45.974,3.937)
  Bottom Layer w0.5: v1@28.905,30.074 v1(28.956,30.124) ; P6.1@48.59,1.626 cw(c48.59,1.295) P6.1@48.92,1.295
VIN: C11.1 L1.2 SW1.2 U4.5 | length 8.2
  Top Layer w0.4: U4.5 ccw(c2.668,42.892) 2.668,42.799 L1.2 ccw(c5.179,42.799) 5.179,42.7 C11.1 7.75,44.418 ccw(c7.014,44.418) SW1.2
pads on no net: AE1.2 P3.3 SW1. SW1.3 U1.18 U1.19 U1.20 U1.23 U1.28 U2.5 U2.13 U2.14 U2.15 U2.16 U2.17 U2.18 U3.1 U3.7 U3.8 U3.12 U3.13 U3.15 U3.16 U3.21 U3.22 U3.23 U3.24 U4.2 U4.3 U4.4 U6.3 U6.7

## Polygon pours and split planes (outlines as drawn)
GND on Top Layer "GND_L01_P008" (solid, remove dead copper, pour order 8): 0,0 50,0 50,50 0,50
GND on Bottom Layer "ground_bottom_layer" (solid, remove dead copper, pour order 7): 0,0 50,0 50,50 0,50

## Keep-outs
Keep-Out Layer:
  rectangle: 38.303,3.124 42.316,5.537

## Silkscreen, mask and mechanical layers (free items; w line width, h text height)
Top Overlay:
  circle w0.3: c0.5,34.5 r0.1
  lines w0.1: 0.178,29.616 1.016,29.616 0.991,28.219 ; 0.991,11.709 0.991,11.963 1.753,11.963 ; 1.25,29.75 2.75,29.75 2.75,29.25 ; 1.829,9.881 1.829,10.922 1.905,10.922 ; 1.829,12.802 1.829,13.97 1.956,13.97 ; 2.75,28.25 2.75,28.75 ; 2.75,31.2 4.25,31.2 4.25,30.4 ; 2.921,9.525 3.023,9.525 3.023,8.89 ; 3.302,40.208 3.302,43.51 6.452,43.51 ; 3.561,33.731 3.511,32.258 4.222,32.258 ; 3.654,29.055 5,29.055 5,28.445 ; 4,37.5 7,37.5 7,39 ; 5.334,10.16 5.817,10.16 5.791,14.478 ; 6.35,29.362 6.35,28.702 7.823,28.702 ; 7.112,39.853 8.915,39.853 8.9,43.6 ; 11,43.5 11.5,43.5 11.5,39.6 ; 13.5,44 18,44 18,45 18,46 ; 16,26 26.5,26 28.5,29 ; 29,46 29,45 29,44 33,44 33.5,44 ; 34.75,5.5 34.947,5.5 35.517,5.5 35.517,4.013 ; 34.755,1.108 35.517,1.108 35.517,2.429 ; 36.1,10.3 36.1,11.1 37.6,11.1 ; 36.8,15.5 37.4,15.9 36.8,16.4 ; 37.25,6.85 37.25,7.525 38.725,7.525 ; 37.49,0.09 37.49,1.84 38.24,1.84 ; 37.9,11.1 39.3,11.1 39.3,10.3 ; 38,13.5 38,12.25 39,12.25 ; 39.25,1.84 40,1.84 40,0.09 ; 39.75,12.5 39.75,10.75 40.5,10.75 ; 41.25,10.25 42.25,10.25 42.25,12.25 ; 41.75,1.84 42.75,1.84 42.75,0.09 ; 43,11.25 43,11.75 43.75,11.75 43.75,12.25 43,12.25 43,12.75 43.75,12.75 43.75,13.25 ; 43.79,4.515 43.79,3.765 45.54,3.765 ; 44.25,1.75 45.75,1.75 45.75,2.5 ; 44.25,7.25 45.25,7.25 45.25,5.5 ; 44.628,31.725 44.628,31.598 45.415,31.598 ; 45.339,30.302 45.339,29.337 45.542,29.337 ; 45.364,33.985 45.364,32.741 45.466,32.741 ; 46.482,34.163 46.609,34.163 46.609,34.849 ; 47.5,3.7 48.2,3.7 48.2,5 ; 48.5,5 48.5,3.7 49.2,3.7 ; 49.111,28.702 49.34,28.702 49.34,30.912 ; 49.149,33.172 49.352,33.172 49.352,32.512
  lines w0.15: 37.871,29.439 37.897,30.429 39.675,30.404
  lines w0.2: 42.785,30.696 43.332,30.709 43.332,30.099
  text "Solar PWR -" at 17.2,43.3 h0.8 r270
  text "Solar PWR +" at 29.2,43.3 h0.8 r270
  text "DeSCENT CHIPSAT" at 15.7,28.2 h0.8
  text "Ver 2.1.2" at 19.225,26.641 h0.8
  text "C" at 43.28,17.68 h0.5
  text "D" at 44.58,17.68 h0.5
Bottom Overlay:
  lines w0.1: 5.867,10.668 5.867,11.938 7.493,11.938 ; 13.5,44 18,44 18,46 ; 15.5,13 21.5,13 ; 15.5,14.5 21.5,14.5 ; 21.5,26.5 28,26.5 ; 24.25,10 23.25,11 ; 24.25,12 23.25,11 ; 25.25,13 26.25,14 ; 27.25,13 26.25,14 ; 29,46 29,44 33.5,44 ; 23.25,11 26.25,11 26.25,14
  text "Solar PWR +" at 17.8,43.3 h0.8 r90
  text "Solar PWR -" at 29.8,43.3 h0.8 r90
  text "S" at 40.92,28.83 h0.5
  text "O" at 36.979,28.726 h0.5
  text "Rev 2 June 23" at 27.92,27.08 h0.5
  text "Serial Pins Swapped" at 27.92,25.247 h0.5
  text "Silk Adjusted on L6920" at 27.92,24.247 h0.5
  text "LoRa Antenna Untented" at 27.92,23.08 h0.5
  text "Clock Traces Widened" at 27.92,22.08 h0.5
  text "GND" at 46.201,18.834 h0.5
  text "TX" at 46.201,16.334 h0.5
  text "BOARD SIZE: W = 50" at 27.67,16.08 h0.5
  text "BOARD SIZE: H = 50" at 27.67,15.08 h0.5
  text "RX" at 46.201,13.834 h0.5
  text "PT" at 21.42,13.58 h0.5
  text "WIO E-5" at 21.42,12.08 h0.5
  text "W" at 27.17,12.08 h0.5
  text "BME280" at 21.42,11.08 h0.5
  text "NRST" at 46.201,11.084 h0.5
  text "L" at 11.782,10.926 h0.5
  text "MAX M10-S" at 21.42,10.08 h0.5
  text "H" at 25.17,10.08 h0.5
  text "BNO085" at 21.42,9.08 h0.5
  text "SWCLK" at 46.201,8.834 h0.5
  text "W25Q16JVSNIQ" at 21.42,8.08 h0.5
  text "L6920DBTR" at 21.42,7.08 h0.5
  text "WDIO" at 46.201,6.334 h0.5
  text "GND" at 46.201,3.584 h0.5
  text "VCC" at 46.201,1.084 h0.5

## Text inside footprints (layer, text, board x,y; h text height)
PS1: Bottom Overlay "Glue Here" at 17.12,4.36 h1.52 r180
PS2: Top Overlay "Glue Here" at 29.767,4.361 h1.52 r180
U3: Top Overlay "*" at 36.75,5.75 h0.5
U6: Top Overlay "*" at 11.546,32.163 h0.5 r180